# EAGLE board multiSPIschematic2 (EAGLE 9.1.0)
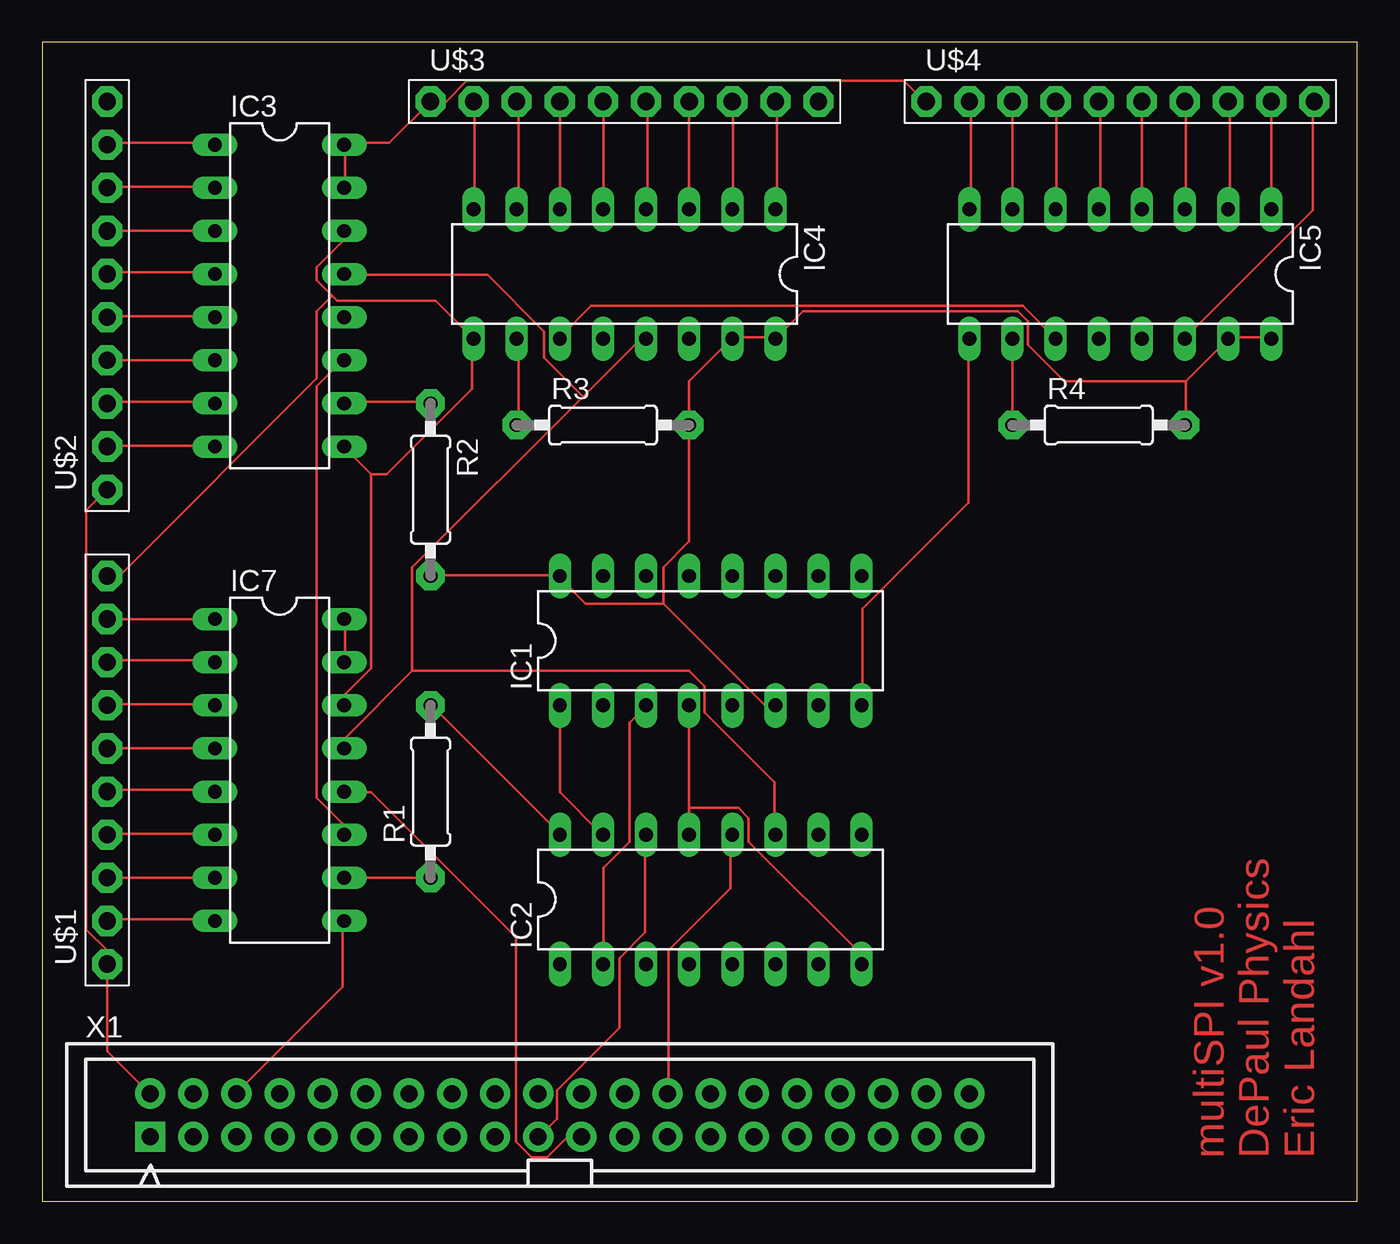
[diagram p0: board, top side]
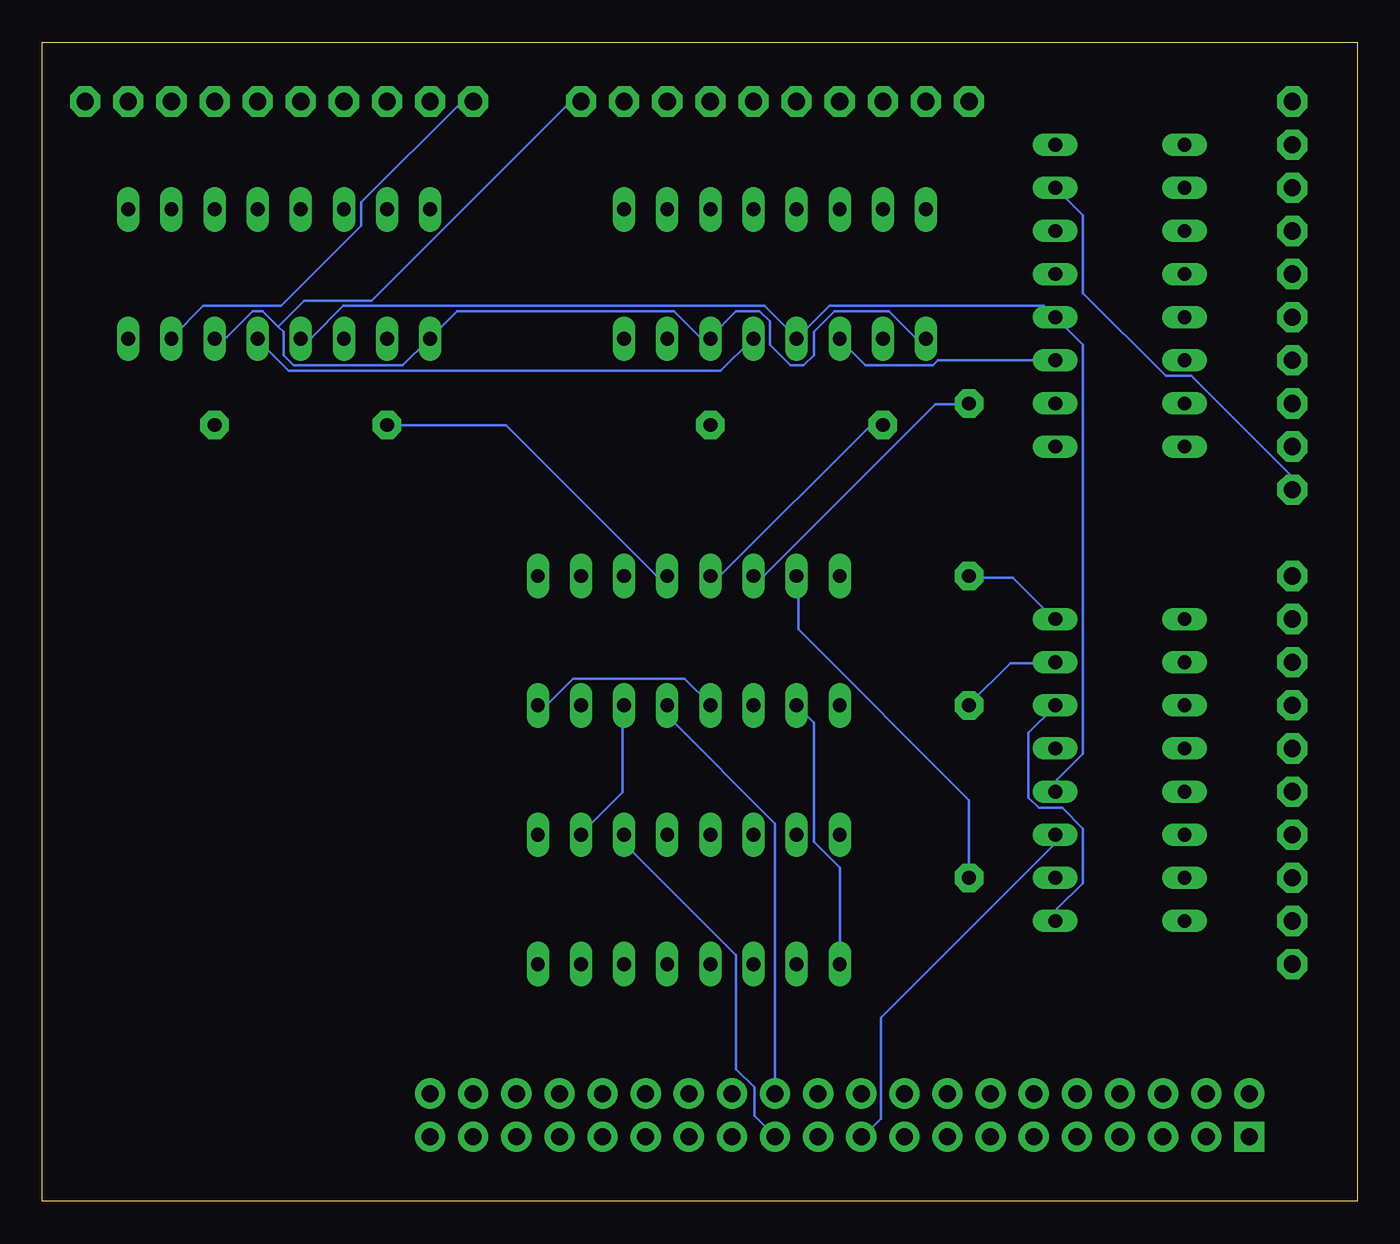
[diagram p1: board, bottom side, seen from below]

Size 77.45 x 68.25 mm. Coordinates in mm from the lower left corner, seen from the top.
Outline: 0,0 77.45,0 77.45,68.25 0,68.25 0,0
Copper layers (1*16): Top 0.035mm / dielectric 1.5mm / Bottom 0.035mm
Design rules "default": minimum track width 6mil, minimum drill 0.35mm, track to track 6mil, track to pad 6mil, pad to pad 6mil, via to via 6mil, smd to smd 6mil, copper to edge 40mil, drill to drill 6mil, minimum pad ring 10mil, minimum via ring 8mil, stop-mask expansion 4mil, vias tented up to drill 0mil, thermal gap 10mil

## Footprints (pad centres in the part's own frame; a part is rotated, then mirrored left to right if it is on the bottom)
DIL16 = drill 0.813 long: 1 -8.89,-3.81; 2 -6.35,-3.81; 3 -3.81,-3.81; 4 -1.27,-3.81; 5 1.27,-3.81; 6 3.81,-3.81; 7 6.35,-3.81; 8 8.89,-3.81; 9 8.89,3.81; 10 6.35,3.81; 11 3.81,3.81; 12 1.27,3.81; 13 -1.27,3.81; 14 -3.81,3.81; 15 -6.35,3.81; 16 -8.89,3.81
0207/10 = drill 0.813 pad 1.676 octagon: 1 -5.08,0; 2 5.08,0
1X10-BIG = drill 1.016 pad 1.778 octagon: 1 -11.43,0; 2 -8.89,0; 3 -6.35,0; 4 -3.81,0; 5 -1.27,0; 6 1.27,0; 7 3.81,0; 8 6.35,0; 9 8.89,0; 10 11.43,0
RASPI_GPIO_B+_BOX = drill 1 pad 1.778 square: 1 -24.13,-1.27 | drill 1 pad 1.778: 2 -24.13,1.27; 3 -21.59,-1.27; 4 -21.59,1.27; 5 -19.05,-1.27; 6 -19.05,1.27; 7 -16.51,-1.27; 8 -16.51,1.27; 9 -13.97,-1.27; 10 -13.97,1.27; 11 -11.43,-1.27; 12 -11.43,1.27; 13 -8.89,-1.27; 14 -8.89,1.27; 15 -6.35,-1.27; 16 -6.35,1.27; 17 -3.81,-1.27; 18 -3.81,1.27; 19 -1.27,-1.27; 20 -1.27,1.27; 21 1.27,-1.27; 22 1.27,1.27; 23 3.81,-1.27; 24 3.81,1.27; 25 6.35,-1.27; 26 6.35,1.27; 27 8.89,-1.27; 28 8.89,1.27; 29 11.43,-1.27; 30 11.43,1.27; 31 13.97,-1.27; 32 13.97,1.27; 33 16.51,-1.27; 34 16.51,1.27; 35 19.05,-1.27; 36 19.05,1.27; 37 21.59,-1.27; 38 21.59,1.27; 39 24.13,-1.27; 40 24.13,1.27

## Placement (x,y rotation side)
IC1  74S138N  [DIL16]  39.37,33.02 0 top
IC2  74LS595N  [DIL16]  39.37,17.78 0 top
IC3  MCP3008  [DIL16]  13.97,53.34 270 top
IC4  MCP3008  [DIL16]  34.29,54.61 180 top
IC5  MCP3008  [DIL16]  63.5,54.61 180 top
IC7  MCP3008  [DIL16]  13.97,25.4 270 top
R1  [0207/10]  22.86,24.13 90 top
R2  [0207/10]  22.86,41.91 270 top
R3  [0207/10]  33.02,45.72 0 top
R4  [0207/10]  62.23,45.72 0 top
U$1  PINHD-1X10  [1X10-BIG]  3.81,25.4 90 top
U$2  PINHD-1X10  [1X10-BIG]  3.81,53.34 90 top
U$3  PINHD-1X10  [1X10-BIG]  34.29,64.77 0 top
U$4  PINHD-1X10  [1X10-BIG]  63.5,64.77 0 top
X1  RASPI_GPIO_B+_BOX  [RASPI_GPIO_B+_BOX]  30.48,5.08 0 top

## Library data of the parts
IC1 IC2 = 74xx-us
IC3-IC5 IC7 R1-R4 U$1-U$4 = adafruit
X1 = raspberrypi_bastelstube_v13

## Nets
3V3: X1.1
GND: IC1.4 IC1.8 IC2.8 IC2.13 IC3.9 IC3.14 IC4.9 IC4.14 IC5.9 IC5.14 IC7.9 IC7.14 U$1.10 U$3.10 U$4.10 X1.6
N$1: IC1.1 IC2.15
N$2: IC1.2 IC2.1
N$3: IC1.3 IC2.2
N$4: IC2.11 IC3.13 IC4.13 IC5.13 IC7.13 X1.23
N$5: IC3.12 IC4.12 IC5.12 IC7.12 X1.21
N$6: IC1.15 IC7.10 R1.1
N$7: IC2.14 IC3.11 IC4.11 IC5.11 IC7.11 X1.19
N$8: IC1.13 IC4.10 R3.1
N$9: IC1.14 IC3.10 R2.1
N$10: IC1.12 IC5.10 R4.1
N$11: IC2.12 X1.26
N$12: IC7.8 U$1.2
N$13: IC7.7 U$1.3
N$14: IC7.6 U$1.4
N$15: IC1.5 X1.24
N$16: IC7.5 U$1.5
N$17: IC7.4 U$1.6
N$18: IC7.3 U$1.7
N$19: IC7.2 U$1.8
N$20: IC7.1 U$1.9
N$21: IC3.8 U$2.2
N$22: IC3.7 U$2.3
N$23: IC3.6 U$2.4
N$24: IC3.5 U$2.5
N$25: IC3.4 U$2.6
N$26: IC3.3 U$2.7
N$27: IC3.2 U$2.8
N$28: IC3.1 U$2.9
N$29: IC4.1 U$3.9
N$30: IC4.2 U$3.8
N$31: IC4.3 U$3.7
N$32: IC4.4 U$3.6
N$33: IC4.5 U$3.5
N$34: IC4.6 U$3.4
N$35: IC4.7 U$3.3
N$36: IC4.8 U$3.2
N$37: IC5.1 U$4.9
N$38: IC5.2 U$4.8
N$39: IC5.3 U$4.7
N$40: IC5.4 U$4.6
N$41: IC5.5 U$4.5
N$42: IC5.6 U$4.4
N$43: IC5.7 U$4.3
N$44: IC5.8 U$4.2
VCC: IC1.6 IC1.16 IC2.10 IC2.16 IC3.15 IC3.16 IC4.15 IC4.16 IC5.15 IC5.16 IC7.15 IC7.16 R1.2 R2.2 R3.2 R4.2 U$1.1 U$2.1 U$3.1 U$4.1 X1.2

## Tracks (layer width: path | path; a pad name or v marks a point on that pad's centre or on a via)
GND
  Top 0.152: IC7.9 17.68,16.46 17.68,12.65 11.43,6.4 X1.6 | 19.36,42.82 19.36,31.39 17.83,29.87 17.83,29.26 IC7.14 | 19.36,42.82 17.83,44.35 IC3.9 | 19.36,42.82 20.27,42.82 25.3,47.85 25.3,50.75 IC4.9 23.16,53.03 17.37,53.03 17.07,53.34 | 17.07,53.34 16.15,54.25 16.15,55.02 17.68,56.54 17.68,57.15 IC3.14 | 17.07,53.34 16.15,52.43 16.15,48.46 4.57,36.88 3.81,36.88 U$1.10 | IC1.4 38.1,23.16 | 38.1,23.16 IC2.13 | 38.1,23.16 41,23.16 41.6,22.55 41.6,21.18 48.16,14.63 48.16,14.02 IC2.8 | U$4.10 74.83,64.77 74.83,58.37 67.36,50.9 IC5.14 | IC1.8 48.31,29.26 48.31,34.9 54.56,41.15 54.56,50.75 IC5.9
  Bottom 0.152: IC7.9 17.68,16.61 17.68,17.22 16.15,18.75 16.15,21.95 17.37,23.16 18.75,23.16 19.36,23.77 19.36,27.58 17.83,29.11 IC7.14 | IC1.8 48.16,29.26 47.7,29.26 46.18,30.79 39.62,30.79 38.1,29.26 IC1.4 | 38.1,50.9 38.71,50.9 40.23,52.43 53.03,52.43 54.56,50.9 IC5.9 54.71,50.75 56.24,49.23 62.64,49.23 63.25,49.84 63.25,51.21 63.55,51.51 | 63.55,51.51 64.47,52.43 65.08,52.43 66.6,50.9 67.21,50.9 IC5.14 | U$3.10 46.33,64.77 58.06,53.03 62.03,53.03 63.55,51.51 | 38.1,50.9 36.58,52.43 35.2,52.43 34.59,51.82 34.59,50.44 33.38,49.23 32.61,49.23 32,49.84 32,51.21 30.79,52.43 27.58,52.43 26.06,50.9 25.45,50.9 IC4.9 | 38.1,50.9 IC4.14
N$1
  Top 0.152: IC1.1 30.48,24.08 32.92,21.64 IC2.15
N$2
  Bottom 0.152: IC2.1 30.48,19.66 32,21.18 32,28.19 IC1.2
N$3
  Top 0.152: IC2.2 33.07,14.02 33.07,19.66 34.59,21.18 34.59,28.19 35.51,29.11 IC1.3
N$4
  Top 0.152: 21.79,31.24 17.83,27.28 17.83,26.67 IC7.13 | 21.79,31.24 21.79,37.34 31.85,47.4 | 31.85,47.4 35.2,50.75 35.51,50.75 IC4.13 | 31.85,47.4 29.57,49.68 29.57,51.21 26.21,54.56 17.83,54.56 IC3.13 | 21.79,31.24 38.1,31.24 39.01,30.33 39.01,28.8 43.13,24.69 43.13,21.64 IC2.11
  Bottom 0.152: X1.23 35.51,5.03 35.51,6.71 36.58,7.77 36.58,14.48 43.13,21.03 43.13,21.49 IC2.11 | IC5.13 64.77,50.75 62.94,48.92 37.49,48.92 35.66,50.75 IC4.13
N$5
  Top 0.152: X1.21 30.94,3.81 29.72,2.59 28.8,2.59 27.89,3.5 27.89,15.54 19.36,24.08 17.83,24.08 IC7.12
  Bottom 0.152: IC7.12 17.68,24.23 17.68,24.84 16.15,26.36 16.15,50.44 IC3.12 18.44,52.73 31.09,52.73 IC4.12 33.07,50.9 34.9,52.73 59.74,52.73 61.57,50.9 62.18,50.9 IC5.12
N$6
  Top 0.152: R1.1 IC7.10
  Bottom 0.152: R1.1 22.86,23.62 32.92,33.68 32.92,36.73 IC1.15
N$7
  Top 0.152: IC2.14 35.51,21.49 35.51,15.85 33.98,14.33 33.98,10.21 30.33,6.55 30.33,4.88 29.26,3.81 X1.19 | IC5.11 57.76,52.73 32.31,52.73 30.48,50.9 IC4.11 | IC7.11 17.68,21.64 17.68,22.25 16.15,23.77 16.15,48.01 17.68,49.53 IC3.11
  Bottom 0.152: IC7.11 17.83,21.49 17.83,21.03 28.04,10.82 28.04,4.88 29.11,3.81 X1.19 | IC3.11 24.69,49.53 24.99,49.23 28.96,49.23 30.48,50.75 IC4.11
N$8
  Top 0.152: IC4.10 28.04,50.75 28.04,45.72 R3.1
  Bottom 0.152: R3.1 28.65,45.72 37.49,36.88 38.1,36.88 IC1.13
N$9
  Top 0.152: IC3.10 17.83,47.09 22.86,47.09 R2.1
  Bottom 0.152: IC1.14 35.51,36.88 34.9,36.88 24.84,46.94 22.86,46.94 R2.1
N$10
  Top 0.152: R4.1 IC5.10
  Bottom 0.152: R4.1 50.14,45.72 41.3,36.88 40.69,36.88 IC1.12
N$11
  Top 0.152: IC2.12 40.54,21.49 40.54,18.44 36.88,14.78 36.88,6.4 X1.26
N$12
  Top 0.152: IC7.8 10.06,16.61 3.81,16.61 U$1.2
N$13
  Top 0.152: U$1.3 IC7.7
N$14
  Top 0.152: IC7.6 10.06,21.64 3.81,21.64 U$1.4
N$15
  Bottom 0.152: X1.24 34.29,22.25 40.54,28.5 40.54,29.11 IC1.5
N$16
  Top 0.152: IC7.5 10.06,24.23 3.81,24.23 U$1.5
N$17
  Top 0.152: U$1.6 IC7.4
N$18
  Top 0.152: IC7.3 10.06,29.26 3.81,29.26 U$1.7
N$19
  Top 0.152: IC7.2 10.06,31.85 3.81,31.85 U$1.8
N$20
  Top 0.152: U$1.9 IC7.1
N$21
  Top 0.152: IC3.8 10.06,44.5 3.81,44.5 U$2.2
N$22
  Top 0.152: IC3.7 10.06,47.09 3.81,47.09 U$2.3
N$23
  Top 0.152: U$2.4 IC3.6
N$24
  Top 0.152: IC3.5 10.06,52.12 3.81,52.12 U$2.5
N$25
  Top 0.152: IC3.4 10.06,54.71 3.81,54.71 U$2.6
N$26
  Top 0.152: U$2.7 IC3.3
N$27
  Top 0.152: IC3.2 10.06,59.74 3.81,59.74 U$2.8
N$28
  Top 0.152: IC3.1 10.06,62.33 3.81,62.33 U$2.9
N$29
  Top 0.152: IC4.1 43.28,58.52 43.28,64.77 U$3.9
N$30
  Top 0.152: IC4.2 40.69,58.52 40.69,64.77 U$3.8
N$31
  Top 0.152: U$3.7 IC4.3
N$32
  Top 0.152: IC4.4 35.66,58.52 35.66,64.77 U$3.6
N$33
  Top 0.152: IC4.5 33.07,58.52 33.07,64.77 U$3.5
N$34
  Top 0.152: U$3.4 IC4.6
N$35
  Top 0.152: IC4.7 28.04,58.52 28.04,64.77 U$3.3
N$36
  Top 0.152: IC4.8 25.45,58.52 25.45,64.77 U$3.2
N$37
  Top 0.152: U$4.9 IC5.1
N$38
  Top 0.152: IC5.2 69.95,58.52 69.95,64.77 U$4.8
N$39
  Top 0.152: IC5.3 67.36,58.52 67.36,64.77 U$4.7
N$40
  Top 0.152: U$4.6 IC5.4
N$41
  Top 0.152: IC5.5 62.33,58.52 62.33,64.77 U$4.5
N$42
  Top 0.152: IC5.6 59.74,58.52 59.74,64.77 U$4.4
N$43
  Top 0.152: U$4.3 IC5.7
N$44
  Top 0.152: IC5.8 54.71,58.52 54.71,64.77 U$4.2
VCC
  Top 0.152: X1.2 6.25,6.4 3.81,8.84 U$1.1 3.81,14.78 2.59,16 2.59,40.69 U$2.1 | IC3.15 17.83,59.74 17.83,62.18 IC3.16 17.83,62.33 20.42,62.33 U$3.1 23.77,64.77 24.99,65.99 50.75,65.99 51.97,64.77 U$4.1 | IC5.16 72.39,50.9 69.95,50.9 IC5.15 67.36,48.31 | 67.36,48.31 67.36,45.72 R4.2 | R2.2 22.86,36.88 30.48,36.88 IC1.16 30.48,36.73 32,35.2 36.58,35.2 | IC7.15 17.83,31.85 17.83,34.29 IC7.16 | IC2.16 30.48,21.64 22.86,29.26 R1.2 | 36.58,35.2 42.52,29.26 43.13,29.26 IC1.6 | 36.58,35.2 36.58,37.34 38.1,38.86 R3.2 38.1,48.31 40.54,50.75 IC4.15 40.69,50.9 43.13,50.9 IC4.16 44.81,52.43 57.45,52.43 58.06,51.82 58.06,50.44 60.2,48.31 67.36,48.31
  Bottom 0.152: U$2.1 3.81,42.67 9.75,48.62 11.28,48.62 16.15,53.49 16.15,58.06 IC3.15 | U$4.1 52.73,64.77 58.67,58.83 58.67,57.45 63.4,52.73 67.97,52.73 69.8,50.9 IC5.15 | IC1.6 43.28,29.11 43.28,24.08 45.72,21.64 IC2.10 | IC7.15 17.83,31.7 20.42,31.7 22.86,29.26 R1.2 | R2.2 22.86,36.73 20.27,36.73 17.83,34.29 IC7.16

## Text on the board
Top: multiSPI v1.0 / DePaul Physics / Eric Landahl